# Altium PCB 7798-20-0228.PcbDoc (part 2 of 2)
Units mil, origin at the board's own origin, x right, y up, seen from the top; angles counter-clockwise.
Board outline 3346.46 x 2125.98 mil, 6 copper layers (Top Signal, Ground Plane (GND), Inner Layer 1, Inner Layer 2, Power Plane (VCC), Bottom Signal), stack 51.068 mil thick; 141 components, 100 nets, 613 pads, 275 vias.
Unrouted connection lines stored in the file: 12.
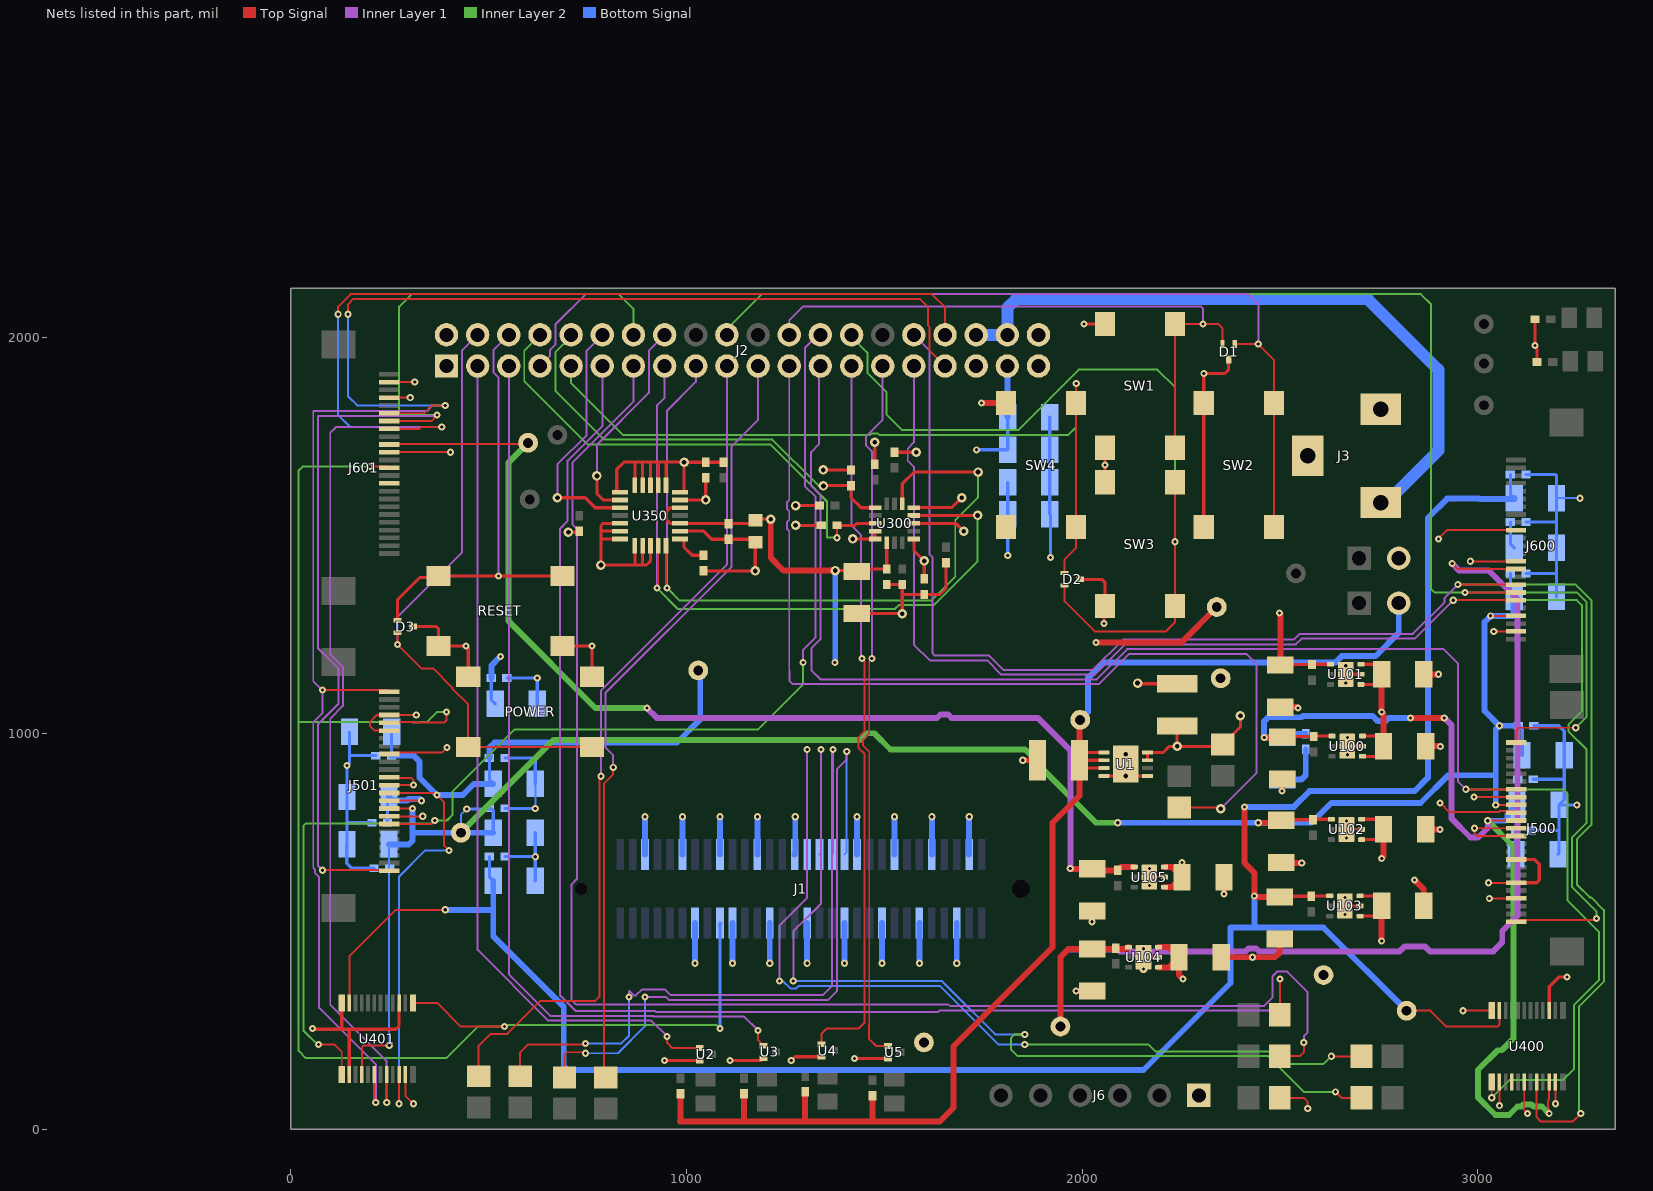
[diagram p6: the nets of this part, all layers, seen from the top]

## Via types
v1: diameter 18, hole 8, Top Signal to Bottom Signal, 235 vias
v2: diameter 24, hole 12, Top Signal to Bottom Signal, 28 vias
v3: diameter 19.68, hole 7.87, Top Signal to Bottom Signal, 12 vias

## Nets (pads, with @x,y where several pads share a name; then routed paths per layer and width w, separated by ;. In a path a pad name is that pad's centre, name@x,y a point inside that pad or via, vN(x,y) a via of type N, cw(c..) or ccw(c..) an arc to the next point about the centre after c; other vN are vias at no path point) (continued)
sCSI1_XCLOCK/sCAM1_XCLOCK: J1.17 J501.5 J601.13 U401.13 | length 3898
  Top Signal w5: v1(200,1675) 245.87,1675 J601.13@248.98,1671.89 ; J501.5@248.98,1027.48 251.5,1030 308.17,1030 309.5,1028.67 388.67,1028.67 393.7,1033.7 v1(393.7,1055) ; U401.13@308.96,319.55 370.45,319.55 430,260 v1(540,260)
  Inner Layer 2 w5: v1(200,1675) 30,1675 20,1665 20,1030 ; v1(393.7,1055) 370.42,1055 345.42,1030 326.16,1030 324.83,1028.67 309.5,1028.67 308.17,1030 20,1030 ; v1(1085,255) 1076.5,263.5 543.5,263.5 v1(540,260) 472.66,260 392.66,180 38.5,180 20,198.5 20,1030
  Bottom Signal w8: J1.17@1083,515.3 J1.17@1084.65,516.94 ; v1(1085,255) 1085,516.59 J1.17@1084.65,516.94 ; J1.17@1084.65,516.94 1087,519.3 J1.17@1084.65,521.65 J1.17@1084.65,516.94
sGND: C1.1 C2.1 C3.1 C4.1 C5.1 C6.1 C100.1 C101.1 C102.1 C103.1 C104.1 C105.1 C106.1 C107.1 C108.1 C109.1 C110.1 C111.1 C300.2 C301.2 C302.1 C303.1 C304.1 C350.2 C351.1 C352.1 C353.2 C400.2 C401.1 C402.1 C403.2 C404.2 C405.1 C406.1 C407.2 C408.2 C409.1 C410.1 C411.2 C412.2 C413.1 C414.1 C415.2 C500.2 C502.1 C504.2 C505.1 C506.1 C507.2 C508.2 C510.1 C512.2 C513.1 C514.1 C515.2 D1.3 D2.3 D3.3 J1.6 J1.12 J1.13 J1.18 J1.19 J1.24 J1.25 J1.30 J1.31 J1.37 J1.40 J1.43 J1.46 J1.49 J1.52 J1.55 J1.58 J2.1 J2.2 J2.39 J2.40 J3.2 J3.3 J6.1 J500.4 J500.6 J500.9 J500.12 J500.13 J500.17 J501.4 J501.6 J501.9 J501.12 J501.13 J501.17 J600.2 J600.15 J601.2 J601.15 POWER.1 POWER.2 R7.2 R9.2 R302.1 R304.2 R351.2 RESET.1 RESET.2 SW1.1 SW1.2 SW2.1 SW2.2 SW3.1 SW3.2 SW4.1 SW4.2 TP16.1 U1.4 U1.5 U1.9 U2.2 U3.2 U4.2 U5.2 U100.5 U100.7@2670,968.35 U101.5 U101.7@2666,1150.06 U102.5 U102.7@2668,758 U103.5 U103.7@2664,564.58 U104.5 U104.7@2155,435 U105.5 U105.7@2170,637.72 U300.3 U300.5 U300.12 U300.13 U350.1 U350.5 U350.6 U350.7 U350.8 U350.9 U350.10 U350.14 U350.19 U350.20 U350.21 U350.22 U350.23 U350.24 U400.2 U400.15 U400.24 U401.2 U401.15 U401.24 | length 12125.3
  Top Signal w5: J501.17@248.98,791.26 v1(333.74,791.26) ; J501.13@248.98,870 v1(310,870) 310,883.14 305.14,888 250.66,888 J501.12@248.98,889.69 ; J501.9@248.98,948.74 252.76,952.53 382.53,952.53 v1(395,965) ; J501.6@248.98,1007.8 212.06,1007.8 200,1019.85 200,1029.33 217.83,1047.17 J501.4@248.98,1047.17 v1(317.17,1047.17) ; J601.2@248.98,1888.43 v1(313.43,1888.43) ; U104.7@2155,435 U104.5@2193.39,435 ; U105.7@2170,637.72 U105.5@2208.39,637.72 ; v1(2900,1492.09) 2922.91,1515 3095.39,1515 J600.15@3096.02,1514.37 ; v1(2962,300) 2962.55,300.55 U400.24@3035.04,300.55 ; v1(2990.24,839.76) J500.17@3097.05,839.76 ; v1(3027.17,623.23) J500.6@3097.05,623.23 ; v1(3028.86,583.86) J500.4@3097.05,583.86 ; v1(3040.18,1258.46) J600.2@3096.02,1258.46 ; U400.2@3054.13,119.45 v1(3054.29,60) ; J500.12@3097.05,741.34 2998.66,741.34 2991.02,748.98 v1(2991.02,761.02) J500.13@3097.05,761.02
  Top Signal w8: v1(55,255) 57,253 129,253 ; U401.24@129.04,319.55 129.04,253.04 129,253 ; U401.2@148.13,138.45 148.13,252.87 148,253 ; U401.15@274.12,319.55 274.12,261.12 266,253 148,253 ; D3.3@308.58,1270.75 367.76,1270.75 373.5,1265 RESET.2@373.5,1221.58 v1(443.42,1221.58) 448.5,1216.5 POWER.1@448.5,1143.58 ; RESET.1@686.5,1221.58 v1(761.58,1221.58) 761.58,1143.67 POWER.2@761.5,1143.58 ; U350.1@824,1611.15 824,1667.92 842.23,1686.15 869.63,1686.15 ; U350.7@832.23,1492.09 784.94,1492.09 784,1491.15 ; U350.6@832.23,1511.78 784.63,1511.78 784,1511.15 ; U350.5@832.23,1531.46 789.32,1531.46 784,1526.15 784,1511.15 ; U350.8@869.63,1474.38 869.63,1426.78 869,1426.15 ; U350.24@869.63,1627.92 869.63,1686.15 ; U350.9@889.32,1474.38 889.32,1426.46 889,1426.15 ; U350.23@889.32,1627.92 889.32,1686.15 ; U350.10@909,1474.38 909,1436.15 899,1426.15 889,1426.15 ; U350.22@909,1627.92 909,1686.15 ; U350.21@928.68,1627.92 928.68,1686.15 ; v1(944.88,174.25) U2.2@1033.5,174.25 ; U350.20@948.37,1627.92 948.37,1686.15 ; U350.14@983.8,1511.78 1043.37,1511.78 1063.68,1491.46 C352.1@1106.13,1491.46 1166.76,1491.46 C353.2@1174,1484.22 v2(1174,1411.15) 1173.69,1411.46 R351.2@1043.37,1411.46 ; U350.19@994,1611.15 v2@994,1685.83 ; C350.2@1094,1685.83 C351.1@1049,1685.83 994.32,1685.83 v2(994,1686.15) 948.37,1686.15 ; v1(1110,174.25) 1189.25,174.25 U3.2@1195,180 ; v1(1265,174.25) 1274.25,183.5 U4.2@1341.1,183.5 ; v2(1275.79,1576.46) R304.2@1336.1,1576.46 ; v2@1417.09,1492.09 U300.13@1476.57,1492.09 ; v1(1425,179.25) U5.2@1509.25,179.25 ; C304.1@1430.79,1303.32 v2(1545.47,1303.32) 1545.47,1351.15 ; U300.13@1475.79,1492.09 U300.12@1476.57,1511.78 ; C300.2@1475.79,1681.15 v2(1475.79,1736.46) ; C303.1@1506.1,1376.78 R302.1@1545.47,1376.78 1545.47,1351.15 ; U300.3@1575,1531.46 1680.79,1531.46 v2(1700.79,1511.46) ; U300.5@1575,1570.83 1575.63,1571.46 1670.79,1571.46 v2(1695.79,1596.46) ; 1641,1351.46 1640.68,1351.78 ; C301.2@1655.79,1431.78 1655.79,1380.15 1655.79,1366.88 1640.68,1351.78 ; D2.3@1994.29,1390 2049.88,1390 2057.42,1382.46 SW3.1@2057.42,1322.39 2055,1319.98 v1(2055,1278.15) ; v1(2004.61,2035.39) SW1.2@2057.42,2035.39 ; U1.4@2054.88,893.47 U1.9@2110,893.47 ; SW3.2@2057.42,1635.39 SW1.1@2057.42,1722.39 ; v2(2110,893) U1.9@2110,893.47 ; v2(2110,948) U1.9@2110,923 U1.9@2110,893.47 ; v2(2140,1128) 2141.85,1126.15 C1.1@2240,1126.15 ; U1.5@2165.12,893.47 U1.9@2110,893.47 ; SW2.1@2307.42,1522.39 SW2.2@2307.42,1835.39 v1(2307.42,1910) 2360,1910 2370,1920 D1.3@2370,1945.71 ; C107.1@2497.15,479.58 C107.1@2499,481.43 ; C103.1@2499.15,1065.06 C103.1@2501,1066.91 ; C101.1@2503.15,883.35 C101.1@2505,885.2 ; U103.7@2664,564.58 U103.5@2702.39,564.58 ; U101.7@2666,1150.06 U101.5@2704.39,1150.06 ; U102.7@2668,758 U102.5@2706.39,758 ; U100.7@2670,968.35 U100.5@2708.39,968.35 ; J500.6@3097.05,623.23 3148.23,623.23 3155,630 3155,670 3142.72,682.28 J500.9@3097.05,682.28 ; R7.2@3144.31,2047 v1(3144.31,1980.69) 3149.31,1975.69 R9.2@3149.31,1939 ; U400.15@3180.12,300.55 3180.12,360.8 3204.31,385 v1(3225,385) ; 129,253 148,253 ; 784,1491.15 v2(784,1426.15) 869,1426.15 ; 784,1491.15 784,1511.15 ; 869,1426.15 889,1426.15 ; 869.63,1686.15 889.32,1686.15 ; 889.32,1686.15 909,1686.15 ; 909,1686.15 928.68,1686.15 ; 928.68,1686.15 948.37,1686.15 ; 1545.47,1351.15 1546.1,1351.78 C302.1@1600.79,1351.78 1640.68,1351.78
  Top Signal w15: v1(1745.39,1835.39) SW4.2@1807.42,1835.39 ; v1(1850,932.84) C2.1@1886.85,932.84 ; v1(1984.85,349.85) C109.1@2025,349.85 ; v1(2025,524.8) C111.1@2025,552.23 ; C108.1@2351.3,435 v1(2430,435) 2487.15,435 2499,446.85 C107.1@2499,481.43 ; v1(2358.15,595) C110.1@2358.15,637.72 ; C103.1@2501,1066.91 2543.09,1066.91 v1(2545,1065) ; C105.1@2503,674.85 2504.7,673.15 v1(2555,673.15) ; v1(2505,855) C101.1@2505,885.2 ; v1(2840,630) 2863.15,606.85 C106.1@2863.15,565 ; C102.1@2863.15,1150.06 v1(2900,1150.06) ; C104.1@2868.15,758 v1(2904.57,758) ; C100.1@2868.15,968.43 2904.57,968.43 v1(2905,968)
  Bottom Signal w5: C512.2@141.61,839.76 C512.2@141.85,840 ; v1(618.03,811.34) 618.03,873.19 C415.2@618.15,873.31 ; C403.2@3198.27,1595 v1(3258.15,1595)
  Bottom Signal w8: C515.2@148.99,1004.45 148.99,926.15 v1(142.23,919.39) 142.23,775 ; 149.54,944.45 C513.1@215.32,944.45 ; C514.1@205.32,775 142.23,775 ; C510.1@210.69,660 154.37,660 141.61,672.76 141.61,719.39 C508.2@142.23,720 142.23,775 ; C409.1@541.38,690 617.11,690 v1(618.15,688.96) ; C410.1@541.38,811.34 v1(618.03,811.34) ; C413.1@541.38,938.32 617.12,938.32 618.15,939.34 C415.2@618.15,873.31 ; C414.1@546.3,1140.37 v1(623.07,1140.37) C412.2@623.07,1075.37 ; C411.2@618.15,628.31 v1(618.15,688.96) ; C408.2@618.15,749.61 v1(618.15,688.96) ; C5.1@1918.15,1800 C3.1@1918.15,1717.28 C6.1@1918.15,1635 C4.1@1918.15,1555 1920,1553.15 v1(1920,1445) ; C402.1@3121.5,1405 3195.19,1405 ; C406.1@3121.5,1535 3198.27,1535 ; C401.1@3121.5,1655 3196.15,1655 3198.27,1652.88 C403.2@3198.27,1595 3198.27,1535 ; C506.1@3134.69,755.43 3204.57,755.43 ; C505.1@3139.69,885 3218.15,885 ; C502.1@3141.38,1020 3204.45,1020 3218.15,1006.3 C500.2@3218.15,945 3218.15,885 ; C400.2@3198.27,1346.15 C404.2@3198.27,1470 3198.27,1535 ; C504.2@3202.52,695.43 3205,697.91 C507.2@3205,820 ; v1(3249.92,820) C507.2@3205,820 ; C507.2@3205,820 3218.15,833.15 3218.15,885
  Bottom Signal w15: J1.6@895.67,694.88 v1(895.67,790) ; J1.12@990.16,694.88 v1(990.16,790) ; v1(1021.65,420) J1.13@1021.65,521.65 ; J1.18@1084.65,694.88 v1(1084.65,790) ; v1(1116.14,420) J1.19@1116.14,521.65 ; J1.24@1179.13,694.88 1180,695.75 v1(1180,790) ; v1(1210.63,420) J1.25@1210.63,521.65 ; J1.30@1273.62,694.88 1275,696.26 v1(1275,790) ; v1(1305.12,420) J1.31@1305.12,521.65 ; v1(1399.61,420) J1.37@1399.61,521.65 ; J1.40@1431.1,694.88 v1(1431.1,790) ; v1(1494.09,420) J1.43@1494.09,521.65 ; J1.46@1525.59,694.88 v1(1525.59,790) ; v1(1588.58,420) J1.49@1588.58,521.65 ; J1.52@1620.08,694.88 v1(1620.08,790) ; v1(1683.07,420) J1.55@1683.07,521.65 ; J1.58@1714.57,694.88 v1(1714.57,790) ; v1(2505,855) C407.2@2505,883.7 2553.7,883.7 2565,895 C405.1@2565,960.32
  other v1: 2057.42,1678.89
  other v2: 1420,1492.09
  other v3: 2155,405 2155,456.65 2664,542.93 2664,586.24 2170,616.06 2170,659.37 2668,736.35 2668,779.65 2670,946.69 2670,990 2666,1128.41 2666,1171.72
sGPIO_0/sIND2: J2.5 U3.1 | length 2270.2
  Top Signal w5: v1(1181.1,250) 1181.1,225.39 U3.1@1195,211.5
  Inner Layer 1 w5: J2.5@551.18,1929.13 551.18,391.95 656.13,287 916,287 918,285 1146.1,285 v1(1181.1,250)
sGPIO_1/sSW2: D1.1 J2.7 SW2.3 SW2.4 | length 2576.7
  Top Signal w5: D1.1@2385.75,1984.29 2444.71,1984.29 2484.58,1944.42 SW2.4@2484.58,1835.39 SW2.3@2484.58,1522.39
  Inner Layer 1 w5: J2.7@629.92,1929.13 655,1954.21 655,1968.85 668.95,1982.8 668.95,2033.95 745.5,2110.5 2419.5,2110.5 2445,2085 v1(2445,1985)
sGPIO_2/sIND1: J2.3 U2.1 | length 2148.6
  Top Signal w5: v1(951.03,235) 951.03,218.97 964.25,205.75 U2.1@1033.5,205.75
  Inner Layer 1 w5: J2.3@472.44,1929.13 472.44,453.72 651.16,275 911.03,275 v1(951.03,235)
sGPIO_3/sSW4: D2.1 J2.9 SW4.3 SW4.4 | length 1986
  Top Signal w5: D2.1@1955.71,1405.75 1955.71,1440.71 1984.58,1469.58 SW4.3@1984.58,1522.39 SW4.4@1984.58,1835.39 1985,1835.8 v1(1985,1885)
  Inner Layer 2 w5: J2.9@708.66,1929.13 708.66,1885.71 839.37,1755 1463.92,1755 1466.88,1757.96 1484.69,1757.96 1487.66,1755 1965,1755 1985,1775 v1(1985,1885)
sGPIO_12/sSW1: D1.2 J2.24 SW1.3 SW1.4 | length 1616.4
  Top Signal w5: SW1.3@2234.58,1722.39 SW1.4@2234.58,2035.39 2343.87,2035.39 2354.25,2025 D1.2@2354.25,1984.29
  Inner Layer 1 w5: J2.24@1259.84,2007.87 1259.84,2044.84 1295,2080 2300,2080 2305,2075 v1(2305,2035)
sGPIO_13/sCAM0_STROBE: J2.25 J500.18 U400.1 | length 4237
  Top Signal w5: v1(2969.45,859.45) J500.18@3097.05,859.45 ; v1(3035,80) U400.1@3035.04,119.45 U400.1@3035.04,119.45
  Inner Layer 1 w5: J2.25@1338.58,1929.13 1334.55,1925.1 1334.55,1730.81 1315,1711.26 1315,1626.85 1337.2,1604.65 1338.58,1604.65 1338.58,1238.58 1315.68,1215.68 1315.68,1160.16 1338.84,1137 2037,1137 2113.51,1213.51 2913.46,1213.51 2949.8,1177.18 2949.8,879.1 v1(2969.45,859.45)
  Inner Layer 2 w5: v1(2969.45,859.45) 3215.55,859.45 3225.99,849.01 3225.99,579.01 3306.5,498.5 3306.5,378.47 3243,314.97 3243,153 3215,125 3080,125 v1(3035,80)
sGPIO_16/sGYRO_INT2: J2.16 U350.2 | length 537.3
  Top Signal w8: v2(774,1651.15) 774,1606.15 789.63,1590.52 U350.2@832.23,1590.52
  Inner Layer 1 w5: v2(774,1651.15) 774,1729.98 905.17,1861.15 905.17,1945.47 905,1945.64 905,1967.99 J2.16@944.88,2007.87
sGPIO_17/sAG_INT2: J2.10 R300.2 U300.9 | length 1105.9
  Top Signal w8: v2(1346.1,1626.15) 1346.73,1626.78 R300.2@1415.79,1626.78 1415.79,1596.46 1441.42,1570.83 U300.9@1476.57,1570.83
  Inner Layer 2 w5: J2.10@708.66,2007.87 708.66,2003.66 669.63,1964.63 669.63,1865.37 792,1743 1217,1743 1333.85,1626.15 v2(1346.1,1626.15)
sGPIO_18/sGYRO_INT1: J2.12 U350.3 | length 627.4
  Top Signal w8: v2(674,1596.15) 744,1596.15 769.32,1570.83 U350.3@832.23,1570.83
  Inner Layer 1 w5: v2(674,1596.15) 674,1680.89 747.69,1754.58 747.69,1968.16 J2.12@787.4,2007.87
sGPIO_19/sAG_INT1: J2.8 R301.2 U300.11 | length 1271.5
  Top Signal w5: v1(1380.47,1495.2) R301.2@1380.47,1526.46
  Top Signal w8: R301.2@1380.47,1526.46 1426.1,1526.46 1431.1,1531.46 U300.11@1476.57,1531.46
  Inner Layer 2 w5: J2.8@629.92,2007.87 590.21,1968.16 590.21,1890.5 749.71,1731 1212.03,1731 1324.6,1618.43 1324.6,1617.24 1355.2,1586.65 1355.2,1495.2 v1(1380.47,1495.2)
sGPIO_24/sIND4: J2.29 U5.1 | length 1795.1
  Top Signal w5: v1(1468.5,1190) 1462,1183.5 1462,1000.72 1446.5,985.22 1446.5,969.9 1462,954.4 1462,265.03 1460.99,264.01 1460.99,229.01 1479.25,210.75 U5.1@1509.25,210.75
  Inner Layer 1 w5: v1(1468.5,1190) 1468.5,1713.35 1454.29,1727.56 1454.29,1751.23 1496.06,1793 J2.29@1496.06,1929.13
sGPIO_28/sCAM1_RESET: J2.33 J501.1 J601.6 U401.6 | length 4696.8
  Top Signal w5: v1(80,1110) 245.2,1110 J501.1@248.98,1106.22 ; v1(145,2060) 145,2085 158.5,2098.5 1590,2098.5 1610,2078.5 1610,2031.7 1613.83,2027.87 1613.83,1968.85 J2.33@1653.54,1929.13 ; U401.6@211.13,138.45 211.13,72.04 v1(215,68.17) ; J601.6@248.98,1809.68 336.96,1809.68 356.64,1829.37 v1(390.63,1829.37)
  Inner Layer 1 w5: v1(215,68.17) 215,164.28 72,307.28 72,636.84 61.5,647.34 61.5,656.53 57,661.03 57,1029.17 80,1052.17 v1(80,1110) 57,1133 57,1813.97 58.03,1815 345.04,1815 359.41,1829.37 v1(390.63,1829.37)
  Bottom Signal w5: v1(145,2060) 145,1852 167.63,1829.37 v1(390.63,1829.37)
sGPIO_33/sCAM1_PWDN: J2.34 J601.8 U401.8 | length 4448.5
  Top Signal w5: v1(120,2060) 120,2079.09 151.41,2110.5 1620.08,2110.5 1653.54,2077.03 J2.34@1653.54,2007.87 ; v1(242.62,68.17) U401.8@242.62,138.45 ; J601.8@248.98,1770.31 325.31,1770.31 330,1775 v1(381.85,1775)
  Inner Layer 1 w5: v1(242.62,68.17) 242.62,172.38 100,315 100,1038.22 132.02,1070.25 132.02,1168.6 100,1200.62 100,1760 115,1775 v1(381.85,1775)
  Bottom Signal w5: v1(120,2060) 120,1805 150,1775 v1(381.85,1775)
sGPIO_34/sCAM0_PWDN: J2.32 J600.8 U400.8 | length 4349.1
  Top Signal w5: v1(2949.26,1376.57) J600.8@3096.02,1376.57 ; U400.8@3148.62,119.45 3148.62,30.75 3159.37,20 3240,20 v1(3260,40)
  Inner Layer 1 w5: J2.32@1574.8,2007.87 1614,1968.68 1614,1453.66 1622.29,1445.37 1622.29,1202.71 1628,1197 1764.97,1197 1800.97,1161 2027.06,1161 2103.57,1237.51 2535.03,1237.51 2549.51,1252 2835.62,1252 2915,1331.38 2915,1342.31 v1(2949.26,1376.57)
  Inner Layer 2 w5: v1(2949.26,1376.57) 3247.13,1376.57 3286.5,1337.2 3286.5,769.5 3249.99,732.99 3249.99,618.85 3282.34,586.5 3285.9,586.5 3318.5,553.9 3318.5,373.5 3255,310 3255,45 v1(3260,40)
sGPIO_35/sCAM0_RESET: J2.31 J500.1 J600.6 U400.6 | length 3832.2
  Top Signal w5: v1(2937.8,1337.2) J600.6@3096.02,1337.2 ; J500.1@3097.05,524.8 3101.33,529.08 3296.05,529.08 v1(3300,533.03) ; U400.6@3117.13,119.45 3117.13,47.87 v1(3125,40)
  Inner Layer 1 w5: J2.31@1574.8,1929.13 1574.8,1735.89 1559.29,1720.37 1559.29,1689.96 1574.8,1674.45 1574.8,1225.2 1615,1185 1760,1185 1796,1149 2032.03,1149 2108.54,1225.51 2540,1225.51 2554.49,1240 2840.59,1240 v1(2937.8,1337.2)
  Inner Layer 2 w5: v1(2937.8,1337.2) 3250.3,1337.2 3262.5,1325 3262.5,1056.53 3228.63,1022.66 3228.63,1005.87 3274.5,960 3274.5,774.5 3237.99,737.99 3237.99,612.01 3300,550 v1(3300,533.03)
sGPIO_36/sLDO_S\H\D\N\: J2.23 R2.2 | length 2540.8
  Top Signal w5: R2.2@2245,813.63 2346.37,813.63 v2(2350,810)
  Inner Layer 1 w5: J2.23@1259.84,1929.13 1259.84,1590.92 1254.29,1585.37 1254.29,1567.56 1259.84,1562 1259.84,1540.92 1254.29,1535.37 1254.29,1517.56 1259.84,1512 1259.84,1160.16 1260,1160 1260,1133.41 1268.41,1125 2041.97,1125 2118.49,1201.51 2415,1201.51 2440,1176.51 2440,900 v2(2350,810)
sGPIO_69/sCAM1_STROBE: J2.26 J501.18 U401.1 | length 3187.9
  Top Signal w5: v1(70,215) 110,215 129.04,195.96 U401.1@129.04,138.45 ; J501.18@248.98,771.57 354.96,771.57 v1(364.06,780.67)
  Inner Layer 1 w5: v1(1295,1180) 1295,1211.97 1326.58,1243.55 1326.58,1598.29 1299.55,1625.32 1299.55,1974.55 J2.26@1338.58,2013.58
  Inner Layer 2 w5: v1(70,215) 67,215 32,250 32,767 37.76,772.76 356.15,772.76 v1(364.06,780.67) 395,780.67 409.23,794.9 409.23,854.23 565,1010 1180.12,1010 1295,1124.88 v1(1295,1180)
sGPIO_110/sCAM1_VSYNC: J2.14 J501.24 J601.7 | length 2847.1
  Top Signal w5: v1(80,655) 247.44,655 J501.24@248.98,653.46 ; J601.7@248.98,1790 355,1790 v1(370,1805)
  Inner Layer 1 w5: v1(80,655) 69,666 69,1024.19 121.02,1076.22 121.02,1164.04 69,1216.06 69,1803 368,1803 v1(370,1805)
  Inner Layer 2 w5: v1(370,1805) 280,1805 274.12,1810.88 274.12,2079.12 305.5,2110.5 829.5,2110.5 866.14,2073.86 J2.14@866.14,2007.87
sGPIO_114/sCAM0_VSYNC: J2.20 J500.24 J600.7 | length 3613.5
  Top Signal w5: v1(2967.6,1356.89) J600.7@3096.02,1356.89 ; J500.24@3097.05,977.56 3097.05,1007.05 3105,1015 v1(3247.13,1015)
  Inner Layer 2 w5: J2.20@1102.36,2007.87 1102.36,2022.36 1190.5,2110.5 2856,2110.5 2881.5,2085 2881.5,1365.39 2890,1356.89 v1(2967.6,1356.89) 3249.84,1356.89 3274.5,1332.23 3274.5,1042.37 v1(3247.13,1015) v1@3247.13,1008.37
sGPIO_115/sIND3: J2.27 U4.1 | length 1832.5
  Top Signal w5: U4.1@1341.1,215 1341.1,241.1 1355,255 1435,255 1450,270 1450,949.43 1434.5,964.93 1434.5,990.19 1450,1005.69 1450,1183.5 v1(1443.5,1190)
  Inner Layer 1 w5: J2.27@1417.32,1929.13 1417.32,1525.18 1441.5,1501 1441.5,1192 v1(1443.5,1190)
sGYRO_SA0: R351.1 U350.13 | length 77.8
  Top Signal w8: U350.13@994,1491.15 994,1471.15 1014.32,1450.83 R351.1@1043.37,1450.83
sI2C0_SCL: J2.15 U300.4 U350.11 | length 1835.4
  Top Signal w5: v1(926.03,1368.15) 928.68,1370.81 U350.11@928.68,1474.38
  Top Signal w8: U300.4@1575,1551.15 1735.79,1551.15 v2(1735.79,1551.46)
  Inner Layer 1 w5: v1(926.03,1368.15) 926.03,1830.4 944.88,1849.25 J2.15@944.88,1929.13
  Inner Layer 2 w5: v1(926.03,1368.15) 926.03,1366.99 978.01,1315 1526.75,1315 1536.57,1324.82 1624.82,1324.82 1735.79,1435.79 v2(1735.79,1551.46)
sI2C0_SDA: J2.17 U300.6 U350.12 | length 2007.5
  Top Signal w5: U350.12@948.37,1474.38 948.37,1370.81 v1(951.03,1368.15)
  Top Signal w8: U300.6@1545.47,1580.68 1545.47,1631.15 1575.47,1661.15 v2(1737,1661.15)
  Inner Layer 1 w5: v1(951.03,1368.15) 951.03,1816.61 1023.62,1889.21 J2.17@1023.62,1929.13
  Inner Layer 2 w5: v1(951.03,1368.15) 982.36,1336.82 1619.84,1336.82 1679.29,1396.26 1679.29,1539.29 1737,1597 v2(1737,1661.15)
sI2C1_SCL: J2.19 R13.1 | length 2160.9
  Top Signal w5: R13.1@475,134.37 475,211.5 505,241.5 547.66,241.5 631.16,325 770,325 780,335 780,888.37 v1(784,892.37)
  Inner Layer 1 w5: v1(784,892.37) 784,1109 1102.36,1427.36 J2.19@1102.36,1929.13
sI2C1_SDA: J2.21 R16.1 | length 1976.3
  Top Signal w5: R16.1@796,131.37 792,135.37 792,874.21 815,897.21 v1(815,915)
  Inner Layer 1 w5: v1(815,915) 815,946 796,965 796,1104.03 1114.36,1422.39 1114.36,1726.26 1181.1,1793 J2.21@1181.1,1929.13
sI2C2_SCL: J1.32 R12.1 | length 2450.4
  Top Signal w5: v1(2629.61,185) 2629.98,184.63 R12.1@2705.63,184.63
  Inner Layer 1 w5: v1(1235.12,375) 1235.12,515.12 1305.12,585.12 v1(1305.12,960)
  Inner Layer 2 w5: v1(1855,215) 2167,215 2185,197 2474.97,197 2506.97,165 2609.61,165 v1(2629.61,185)
  Bottom Signal w5: v1(1235.12,375) 1243.84,375 1262.34,356.5 1277.66,356.5 1284.16,363 1640.03,363 1788.03,215 v1(1855,215) ; J1.32@1305.12,694.88 v1(1305.12,960)
sI2C2_SDA: J1.34 R14.1 | length 2524.4
  Top Signal w5: v1(2640.31,95) 2655.31,80 R14.1@2705.63,80
  Inner Layer 1 w5: v1(1270,375) 1270,500.67 1340,570.67 v1(1340,960)
  Inner Layer 2 w5: v1(1855,240) 1830,240 1820,230 1820,202.5 1837.5,185 2470,185 2560,95 v1(2640.31,95)
  Bottom Signal w5: v1(1270,375) 1645,375 1780,240 v1(1855,240) ; J1.34@1336.61,694.88 1340,698.27 v1(1340,960)
sI2C3_SCL: J1.36 R15.1 | length 1869.1
  Top Signal w5: R15.1@580,134.37 580,195 600,215 742.5,215 v1(745,217.5)
  Inner Layer 1 w5: v1(855,335) 855,350 866.5,338.5 872.34,338.5 887.34,353.5 946.44,353.5 960.44,339.5 1344.5,339.5 1368,363 1368,958 v1(1370,960)
  Bottom Signal w5: v1(745,217.5) 835.18,217.5 855,237.32 v1(855,335) ; J1.36@1368.11,694.88 1370,696.77 v1(1370,960)
sI2C3_SDA: J1.38 R17.1 | length 1742.4
  Top Signal w5: R17.1@692,131.37 692,188.97 698.03,195 742.5,195 v1(745,192.5)
  Inner Layer 1 w5: v1(895,335) 947.97,335 955.47,327.5 1358.1,327.5 1380,349.4 1380,910 1405,935 v1(1405,955)
  Bottom Signal w5: v1(745,192.5) 827.15,192.5 895,260.35 v1(895,335) ; J1.38@1399.61,694.88 1405,700.28 v1(1405,955)
sMPP_4/sSW3: D2.2 J2.28 SW3.3 SW3.4 | length 2169.3
  Top Signal w5: D2.2@1955.71,1374.25 1955.71,1334.29 2031.54,1258.46 2211.85,1258.46 2234.58,1281.2 SW3.3@2234.58,1322.39 SW3.4@2234.58,1635.39
  Inner Layer 2 w5: J2.28@1417.32,2007.87 1417.32,2002.68 1457.03,1962.97 1457.03,1911.88 1505,1863.92 1505,1807.47 1545.47,1767 1838.26,1767 1991.26,1920 2190,1920 2235,1875 v1(2235,1485)
sPOWER: D3.2 J2.4 POWER.3 POWER.4 | length 1559.8
  Top Signal w5: D3.2@270,1255 v1(270,1225) 330,1165 360,1165 408.49,1116.51 408.49,1114.06 448.5,1074.05 POWER.3@448.5,966.42 POWER.4@761.5,966.42
  Inner Layer 1 w5: v1(270,1225) 270,1295 433.41,1458.41 433.41,1968.85 J2.4@472.44,2007.87
sPWR_1V2a: C109.2 J600.10 R104.1 TP107.1 U104.1 | length 2748
  Top Signal w5: v1(2935,1430) 2949.06,1415.94 J600.10@3096.02,1415.94
  Top Signal w15: TP107.1@1945,260 1945,435 1966.15,456.15 C109.2@2025,456.15 2112.17,456.15 U104.1@2116.61,460.59
  Inner Layer 1 w15: 1965,455 2090,455 2095,450 2128.64,450 2145.33,433.31 2164.67,433.31 2181.36,450 2413.18,450 2420.68,457.5 2439.32,457.5 2446.82,450 2802.37,450 2814.87,462.5 2866.1,462.5 2878.6,450 3038.86,450 3061.5,472.64 3061.5,501.5 3100,540 3100,1340 3027.87,1412.13 2952.87,1412.13 v1(2935,1430)
sPWR_1V2b: C111.2 J601.10 R105.1 TP108.1 U105.1 | length 2851.7
  Top Signal w5: J601.10@248.98,1730.94 250.16,1732.13 597.13,1732.13 TP108.1@600,1735
  Top Signal w15: v1(1970,659.37) 1970.84,658.53 C111.2@2025,658.53 2028.84,654.68 R105.1@2090,654.68 2098.62,663.31 U105.1@2131.61,663.31
  Inner Layer 1 w15: v1(900,1065) 925,1040 1633.34,1040 1641.84,1048.5 1661.31,1048.5 1669.81,1040 1888,1040 1970,958 v1(1970,659.37)
  Inner Layer 2 w15: TP108.1@600,1735 550,1685 550,1285 770,1065 v1(900,1065)
sPWR_1V5a: C101.2 C405.2 C407.1 C505.2 C507.1 J500.14 R100.1 U100.1 U400.10 | length 2500.4
  Top Signal w5: v1(3025,780) 3025.71,780.71 J500.14@3097.05,780.71 ; v1(3180.12,40) 3180.12,51.83 3177.37,54.59 3177.37,72.66 3180.12,75.41 U400.10@3180.12,119.45
  Top Signal w8: C101.2@2505,991.5 2506.54,993.03 R100.1@2585,993.03 2585.91,993.94 U100.1@2631.61,993.94
  Top Signal w15: v1(2460,990) 2503.5,990 C101.2@2505,991.5 ; v1(2830,1040) v1(2915,1040)
  Inner Layer 1 w15: v1(2915,1040) 2932.8,1022.2 2932.8,786.02 2981.29,737.52 3000.76,737.52 3025,761.77 v1(3025,780)
  Inner Layer 2 w15: v1(3025,780) 3090,715 3090,230 3060,200 3050,200 3000,150 3000,81.06 3044.56,36.5 3078.5,36.5 3100,58 3109.77,58 3115.27,63.5 3134.73,63.5 3140.23,58 3162.12,58 v1(3180.12,40)
  Bottom Signal w8: C507.1@3098.7,820 3100.31,821.61 C505.2@3100.31,885
  Bottom Signal w15: C405.2@2565,999.69 2514.69,999.69 C407.1@2505,990 v1(2460,990) 2460,1031.24 2470.26,1041.5 2554.73,1041.5 2558.23,1045 2733.62,1045 2747.12,1031.5 2766.58,1031.5 2775.08,1040 v1(2830,1040) ; v1(3025,780) 3070,780 3075,785 3075,796.3 C507.1@3098.7,820
sPWR_1V5b: C103.2 C413.2 C415.1 C513.2 C515.1 J501.14 R101.1 TP102.1 U101.1 U401.10 | length 2513.2
  Top Signal w5: J501.14@248.98,850.32 364.09,850.32 v1(369.41,845) 387.72,826.69 387.72,717.28 v1(400,705) ; v1(274.12,65) U401.10@274.12,138.45
  Top Signal w8: C103.2@2501,1173.21 2502.54,1174.75 R101.1@2581,1174.75 2581.91,1175.65 U101.1@2627.61,1175.65
  Top Signal w15: v1(2499,1305) 2501,1303 C103.2@2501,1173.21
  Bottom Signal w5: v1(274.12,65) 274.12,639.08 340.04,705 v1(400,705)
  Bottom Signal w8: C513.2@254.69,944.45 C515.1@254.69,1003.84 ; C413.2@502.01,938.32 502.01,883.16 C415.1@511.85,873.31
  Bottom Signal w15: C513.2@254.69,944.45 310.55,944.45 325,930 325,889.41 v1(369.41,845) 435,845 463.31,873.31 C415.1@511.85,873.31 ; C413.2@502.01,938.32 502.01,964.57 515,977.56 976.02,977.56 1035,1036.54 1035,1155 TP102.1@1030,1160
sPWR_1V8: C4.2 C6.2 C302.2 C351.2 C404.1 C406.2 C412.1 C414.2 C504.1 C506.2 C512.1 C514.2 J2.35 J5.2 J500.15 J501.15 J600.11 J601.11 R11.2 R300.1 R301.1 R303.2 R350.1 TP15.1 U300.1 U350.18 U400.11 U401.11 | length 2179.8
  Top Signal w5: J501.15@248.98,830.63 v1(330.63,830.63) ; J601.11@248.98,1711.26 v1(403.74,1711.26) ; U401.11@289.87,138.45 289.87,85.13 v1(310,65) ; R11.2@2499.37,80 2560,80 2570,70 v1(2570,52.63) ; v1(2904.57,825) 2928,801.58 3052.74,801.58 3055.84,804.67 3092.77,804.67 J500.15@3097.05,800.39 ; v1(2980.83,1435.63) J600.11@3096.02,1435.63 ; U400.11@3194.15,117.73 U400.11@3195.87,119.45 v1(3195.87,65)
  Top Signal w8: v2(702,1509.15) 727,1509.15 R350.1@729,1511.15 ; U350.18@983.8,1590.52 v2(1049,1590.52) C351.2@1049,1646.46 ; v2(1275.79,1526.46) R301.1@1341.1,1526.46 ; v2(1345.79,1666.46) 1346.1,1666.15 R300.1@1415.79,1666.15 ; R303.2@1525.79,1711.15 1580.47,1711.15 v2(1580.79,1711.46) ; U300.1@1575,1492.09 1575,1462.25 v2(1600.79,1436.46) C302.2@1600.79,1391.15
  Top Signal w15: v1(2035,1230) 2250,1230 TP15.1@2340,1320
  Bottom Signal w8: C514.2@244.69,775 C512.1@244.69,836.54 ; C414.2@506.93,1140.37 506.93,1085.21 C412.1@516.77,1075.37 ; v1(1811.85,1450) C4.2@1811.85,1555 C6.2@1811.85,1635 ; C406.2@3082.13,1535 3082.13,1479.84 C404.1@3091.97,1470 ; C506.2@3095.31,755.43 3095.31,696.34 C504.1@3096.22,695.43
  Bottom Signal w15: C512.1@248.15,840 257.52,830.63 294.4,830.63 298.21,834.44 326.81,834.44 v1(330.63,830.63) ; C414.2@506.93,1140.37 506.93,1172.01 v1(529.92,1195)
sPWR_2V8a: C105.2 C400.1 C402.2 C408.1 C410.2 C500.1 C502.2 C508.1 C510.2 J500.16 J501.16 J600.4 J601.4 R102.1 TP103.1 U102.1 U400.4 U401.4 | length 5269.6
  Top Signal w5: U401.4@179.63,138.45 179.63,206.86 185.02,212.25 v1(248.98,212.25) ; J501.16@248.98,810.94 v1(307.94,810.94) ; J601.4@248.98,1849.06 v1(302,1849.06) ; v1(3031.71,1297.83) J600.4@3096.02,1297.83 ; v1(3045.08,820.08) J500.16@3097.05,820.08
  Top Signal w8: C105.2@2503,781.15 2504.54,782.68 R102.1@2583,782.68 2583.91,783.59 U102.1@2629.61,783.59
  Top Signal w15: v1(2445,775) 2496.85,775 C105.2@2503,781.15
  Inner Layer 2 w15: TP103.1@430,749.61 663.89,983.5 1437.71,983.5 1455.27,1001.06 1474.73,1001.06 1515.79,960 1856.08,960 1873.5,942.58 1873.5,936.5 2035,775 v1(2090,775)
  Bottom Signal w5: C508.1@248.53,720 248.98,719.55 v1(248.98,212.25) ; TP103.1@430,749.61 430,795 v1(445,810)
  Bottom Signal w8: v1(445,810) 507.01,810 511.85,805.16 C408.1@511.85,749.61 ; C402.2@3082.13,1405 3082.13,1355.99 C400.1@3091.97,1346.15 ; C502.2@3102.01,1020 3111.85,1010.16 C500.1@3111.85,945
  Bottom Signal w15: C508.1@248.53,720 298.34,720 307.94,729.61 307.94,750 ; v1(307.94,810.94) 307.94,750 ; C408.1@511.85,749.61 TP103.1@430,749.61 308.34,749.61 307.94,750 ; v1(2090,775) v1(2445,775) 2579.61,775 2629.61,825 2855,825 2925,895 3045.08,895 ; v1(3045.08,820.08) 3045.08,895 ; C400.1@3091.97,1346.15 3090,1344.18 3090,1300 3087.83,1297.83 v1(3031.71,1297.83) 3031.71,1297 3016.68,1281.96 3016.68,1057.62 v1(3054.29,1020) ; C502.2@3102.01,1020 v1(3054.29,1020) ; 3045.08,895 3045.08,1010.79 v1(3054.29,1020)
sPWR_2V8b: C107.2 C401.2 C403.1 C409.2 C411.1 R103.1 TP104.1 U103.1 U400.23 U401.23 | length 5843.8
  Top Signal w5: U401.23@148.13,319.55 148.13,438.07 265.06,555 v1(390.63,555) ; TP104.1@2820,300 2880,300 2920,260 3050.08,260 3054.13,264.06 U400.23@3054.13,300.55
  Top Signal w8: C107.2@2499,587.73 2500.54,589.27 R103.1@2579,589.27 2579.91,590.17 U103.1@2625.61,590.17
  Top Signal w15: v1(2410,815) 2410,673.46 2435,648.46 v1(2435,590.17) 2437.44,587.73 C107.2@2499,587.73
  Bottom Signal w8: C409.2@502.01,690 502.01,638.16 C411.1@511.85,628.31 ; C401.2@3082.13,1655 3082.13,1604.84 C403.1@3091.97,1595
  Bottom Signal w15: v1(390.63,555) 511.85,555 ; C411.1@511.85,628.31 511.85,555 ; v1(2410,815) 2535,815 2575,855 2840,855 2873.63,888.63 2873.63,1545 2922.37,1593.74 3004.01,1593.74 3005.27,1592.48 3091.97,1592.48 C403.1@3091.97,1595 ; 2435,510 v1(2435,590.17) ; TP104.1@2820,300 2610,510 2375,510 2375,370 2155,150 700,150 690,160 690,310 511.85,488.15 511.85,555
sPWR_3V3: C2.2 C303.2 C304.2 C352.2 C353.1 J4.2 R3.2 R4.2 R5.2 R6.2 TP3.1 U1.1 U1.2 U1.3 U300.14 U350.15 U350.17 | length 4366.2
  Top Signal w8: U350.17@983.8,1570.83 958.68,1570.83 949,1561.15 949,1541.15 958.68,1531.46 U350.15@983.8,1531.46 1105.5,1531.46 C352.2@1106.13,1530.83 1165.5,1530.83 C353.1@1174,1539.34 1176.81,1542.15 v2(1213,1542.15) ; v2(1376,1412.15) 1428.25,1412.15 C304.2@1430.79,1409.61 1437.32,1416.15 C303.2@1506.1,1416.15 U300.14@1506.1,1482.25 ; U1.3@2054.88,913.16 2012.83,913.16 C2.2@1993.15,932.84 ; U1.2@2054.88,932.84 C2.2@1993.15,932.84 ; U1.1@2054.88,952.53 2012.83,952.53 C2.2@1993.15,932.84
  Top Signal w15: R3.2@985,90.31 985,20.7 983.8,19.5 1145.79,19.5 ; R4.2@1145.79,90.31 1145.79,19.5 ; v2(1213,1542.15) 1213,1444.15 1245,1412.15 v2(1376,1412.15) ; R5.2@1300,95.31 1300,24.5 1305,19.5 ; R6.2@1470,85.31 1470,19.5 ; TP3.1@1995,1035 1993.15,1033.15 C2.2@1993.15,932.84 1993.15,843.15 1925,775 1925,460 1675,210 1675,55 1639.5,19.5 1470,19.5 ; 1145.79,19.5 1305,19.5 ; 1305,19.5 1470,19.5
  Bottom Signal w15: v1(1375,1180) 1376,1181 v2(1376,1412.15) ; TP3.1@1995,1035 2015,1055 2015,1141.7 2053.3,1180 2639.86,1180 2655.92,1196.06 2741.06,1196.06 2800,1255 J4.2@2800,1330
sPWR_5V0: C1.2 C3.2 C5.2 C100.2 C102.2 C104.2 C106.2 C108.2 C110.2 J2.37 R1.2 TP14.1 TP101.1 U1.7 U1.8 U100.4 U100.6 U101.4 U101.6 U102.4 U102.6 U103.4 U103.6 U104.4 U104.6 U105.4 U105.6 | length 2087
  Top Signal w8: U1.7@2165.12,932.84 U1.8@2165.12,952.53 2205,952.53 2220.47,968 v2(2240,968) ; C1.2@2240,1019.85 v2(2240,968) ; R1.2@2345.63,968 v2(2240,968) ; R1.2@2355,972.37 2400,1017.37 v2(2400,1045) ; U103.4@2702.39,538.99 2756.85,538.99 2765.85,538.99 2765.85,590.17 U103.6@2702.39,590.17 ; U101.4@2704.39,1124.47 2756.85,1124.47 2767.85,1124.47 2767.85,1175.65 U101.6@2704.39,1175.65 ; U102.4@2706.39,732.41 2761.85,732.41 2769.85,732.41 2769.85,783.59 2761.85,783.59 U102.6@2706.39,783.59 ; U100.4@2708.39,942.76 2761.85,942.76 2771.85,942.76 2771.85,993.94 2761.85,993.94 U100.6@2708.39,993.94
  Top Signal w15: U104.4@2193.39,409.41 2219.41,409.41 C108.2@2245,435 ; U104.6@2193.39,460.59 2219.41,460.59 C108.2@2245,435 ; U105.4@2208.39,612.13 2226.26,612.13 C110.2@2251.85,637.72 ; U105.6@2208.39,663.31 2226.26,663.31 C110.2@2251.85,637.72 ; v1(2251.85,674.85) C110.2@2251.85,637.72 ; v1(2255,380) 2245,390 C108.2@2245,435 ; R1.2@2345.63,968 R1.2@2350,972.37 ; v1(2756.85,476.5) 2756.85,538.99 C106.2@2756.85,565 ; v1(2756.85,685) 2761.85,690 2761.85,732.41 C104.2@2761.85,758 C104.2@2761.85,783.59 ; C102.2@2756.85,1150.06 2756.85,1124.47 v1(2756.85,1055) 2761.85,1050 2761.85,993.94 C100.2@2761.85,968.43 C100.2@2761.85,942.76
  Bottom Signal w8: v1(1732.72,1717.28) C3.2@1811.85,1717.28 C5.2@1811.85,1800
  Bottom Signal w15: J2.37@1811.02,1929.13 1811.02,1800.83 C5.2@1811.85,1800
sRESET: D3.1 J2.6 RESET.3 RESET.4 | length 1123.9
  Top Signal w8: D3.1@270,1286.5 270,1338.15 326.85,1395 369.76,1395 RESET.4@373.5,1398.75 v1(525,1398.75) RESET.3@686.5,1398.75
  Inner Layer 1 w5: v1(525,1398.75) 525,1900.12 512.15,1912.97 512.15,1968.85 J2.6@551.18,2007.87
sSYS_DCIN: J2.36 J2.38 J3.1 | length 1723.1
  Bottom Signal w30: J2.36@1732.28,2007.87 J2.38@1811.02,2007.87 1811.02,2076.02 1833,2098 2722,2098 2900,1920 2900,1715 2768.78,1583.78 J3.1@2755,1583.78
sUART1_RX/sEXTERNAL_TX: J2.13 R10.2 | length 3854.5
  Top Signal w5: R10.2@2499.37,185 2550,185 2560,195 v1(2560,220)
  Inner Layer 1 w5: J2.13@866.14,1929.13 866.14,1840 867.05,1840 712,1684.95 712,1529.56 723.5,1518.06 723.5,633.22 709,618.73 709,327.97 721.47,315.5 1662.63,315.5 1666.13,312 2460,312 2481.5,333.5 2481.5,387.66 2492.34,398.5 2518.5,398.5 2570,347 2570,245 2560,235 v1(2560,220)
sUART1_TX/sEXTERNAL_RX: J2.11 R8.2 | length 3633.7
  Top Signal w5: R8.2@2499.37,290 2500,290.63 v1(2500,380)
  Inner Layer 1 w5: J2.11@787.4,1929.13 787.4,1777.32 700,1689.92 700,1537.56 680.5,1518.06 680.5,339.5 721,299 920.97,299 922.97,297 1635.84,297 1638.84,300 2485,300 2500,315 v1(2500,380)
pads on no net: J1.0 J1.1 J1.3 J1.5 J1.7 J1.9 J1.11 J1.20 J1.21 J1.22 J1.23 J1.26 J1.27 J1.28 J1.29 J1.33 J1.35 J1.39 J1.41 J1.45 J1.47 J1.51 J1.53 J1.57 J1.59 J1.60 J2.18 J2.22 J2.30 J6.2 J6.6 J500.0 J500.19 J500.20 J500.21 J500.22 J500.23 J501.0 J501.19 J501.20 J501.21 J501.22 J501.23 J600.0 J600.1 J601.0 J601.1 U100.2 U100.7@2670,950.63 U100.7@2670,986.06 U101.2 U101.7@2666,1132.35 U101.7@2666,1167.78 U102.2 U102.7@2668,740.28 U102.7@2668,775.72 U103.2 U103.7@2664,546.87 U103.7@2664,582.3 U104.2 U104.7@2155,417.28 U104.7@2155,452.72 U105.2 U105.7@2170,620 U105.7@2170,655.43 U300.15 U400.7 U400.9 U400.17 U400.19 U400.21 U401.7 U401.9 U401.17 U401.19 U401.21

## Polygon pours and split planes (outlines as drawn)
sPWR_3V3 on Bottom Signal "sPWR-3v3 Bottom" (solid, remove dead copper, pour order 0): 2020,999.69 1130,999.69 1130,1220 1120,1230 1135,1215 2265,1215 2265,999.69 2260.24,1004.45 2020,1004.45
sPWR_1V5b on Inner Layer 2 "sPWR-1V5b inner2" (solid, remove dead copper, pour order 2): 795,1335 790,1330 790,1130 2610,1130 2650,1130 2650,1335
sGND on Ground Plane (GND) (split plane): 3326.36,20.1 20.1,20.1 20.1,2105.89 3326.36,2105.89
sPWR_5V0 on Power Plane (VCC) (split plane): 1929.9,1665 1930.29,1663.05 1931.4,1661.4 2321.4,1271.4 2323.05,1270.29 2325,1269.9 2767.89,1269.9 2804.9,1232.89 2804.9,467.11 2672.89,335.1 2197.11,335.1 2175.1,357.11 2175.1,1270 2174.71,1271.95 2173.6,1273.6 1764.72,1682.49 1763.06,1683.6 1761.11,1683.99 1718.22,1683.99 1705.89,1696.32 1705.89,1728.83 1722.58,1745.53 1735.63,1745.53 1737.58,1745.92 1739.23,1747.03 1778.6,1786.4 1779.71,1788.05 1780.1,1790 1780.1,2105.89 1929.9,2105.89
sPWR_1V8 on Power Plane (VCC) (split plane): 3326.36,20.1 20.1,20.1 20.1,2105.89 1769.9,2105.89 1769.9,1792.11 1733.52,1755.73 1720.47,1755.73 1718.52,1755.34 1716.87,1754.23 1697.18,1734.55 1696.08,1732.9 1695.69,1730.94 1695.69,1694.21 1696.08,1692.26 1697.18,1690.61 1712.51,1675.28 1714.16,1674.18 1716.11,1673.79 1759,1673.79 2164.9,1267.89 2164.9,355 2165.29,353.05 2166.4,351.4 2191.4,326.4 2193.05,325.29 2195,324.9 2675,324.9 2676.95,325.29 2678.6,326.4 2813.6,461.4 2814.71,463.05 2815.1,465 2815.1,1235 2814.71,1236.95 2813.6,1238.6 2773.6,1278.6 2771.95,1279.71 2770,1280.1 2327.11,1280.1 1940.1,1667.11 1940.1,2105.89 3326.36,2105.89

## Keep-outs
Keep-Out Layer:
  lines w10: 0,0 0,2125 3345,2125 3345,0 0,0

## Other copper
Power Plane (VCC) (plane layer: these items are gaps in the copper):
  lines w10: 1775,2125 1775,1790 1735.63,1750.63 1720.47,1750.63 1700.79,1730.94 1700.79,1694.21 1716.11,1678.89 1761.11,1678.89 2170,1270 2170,355 2195,330 2675,330 2810,465 2810,1235 2770,1275 2325,1275 1935,1665 1935,2125.98

## Silkscreen, mask and mechanical layers (free items; w line width, h text height)
Top Overlay:
  lines w5: -540,2705 -530,2715 ; -520,2705 -530,2715 ; -440,2605 -430,2615 ; -440,2625 -430,2615 ; 59,-1 59,34 19,74 19,389 419,389 419,69 384,34 384,-1 ; 714.32,1452.92 724.32,1462.92 ; 734.32,1452.92 724.32,1462.92 ; 814.32,1352.92 824.32,1362.92 ; 814.32,1372.92 824.32,1362.92 ; 1265.79,1456.46 1275.79,1466.46 ; 1285.79,1456.46 1275.79,1466.46 ; 1365.79,1356.46 1375.79,1366.46 ; 1365.79,1376.46 1375.79,1366.46 ; 2965,-20 2965,15 2925,55 2925,370 3325,370 3325,50 3290,15 3290,-20 ; -530,2715 -530,2615 -430,2615 ; 724.32,1462.92 724.32,1362.92 824.32,1362.92 ; 1275.79,1466.46 1275.79,1366.46 1375.79,1366.46
  text "Y" at -580,2665 h30
  text "X" at -480,2565 h30
  text "2732" at 3045,1665 h30 r90
  text "2732" at 306.02,1466.89 h30 r270
  text "Y" at 1225.79,1416.46 h30
  text "Y" at 674.32,1412.92 h30
  text "X" at 1325.79,1316.46 h30
  text "X" at 728.32,1305.92 h30
  text "7251" at 3046.02,951.02 h30 r90
  text "7251" at 305,665 h30 r270
  text "CTS" at 1815,166 h30 r90
  text "TX" at 1918,166 h30 r90
  text "RX" at 2021,166 h30 r90
  text "1.8V" at 2124,166 h30 r90
  text "RTS" at 2227,166 h30 r90
  text "GND" at 2330,166 h30 r90
Mechanical 1:
  the board outline again, w7.87

## Dimensions
0,0 to 3346.46,0 on Mechanical 1
0,0 to 0,2125.98 on Mechanical 1

## Text inside footprints (layer, text, board x,y; h text height)
J2: Bottom Overlay "39" at 1968.7,1954.13 h50 r180; Bottom Overlay "40" at 1968.7,2039.13 h50 r180; Bottom Overlay "2" at 273.7,2034.13 h50 r180; Bottom Overlay "1" at 283.7,1949.13 h50 r180
U400: Top Overlay "1" at 3006.89,99.76 h30 r180; Top Overlay "12" at 3283.46,100.75 h30 r180; Top Overlay "24" at 3012.8,349.76 h30 r180; Top Overlay "13" at 3282.48,351.73 h30 r180
U401: Top Overlay "1" at 100.89,118.76 h30 r180; Top Overlay "12" at 377.46,119.75 h30 r180; Top Overlay "24" at 106.8,368.76 h30 r180; Top Overlay "13" at 376.48,370.73 h30 r180